# Altium PCB SystemV1.PcbDoc (part 2 of 3)
Units mm, origin at the board's own origin, x right, y up, seen from the top; angles counter-clockwise.
Board outline 488.95 x 74.14 mm, 4 copper layers (Top Layer, GND, VCC, Bottom Layer), stack 1.586 mm thick; 264 components, 188 nets, 862 pads, 658 vias.
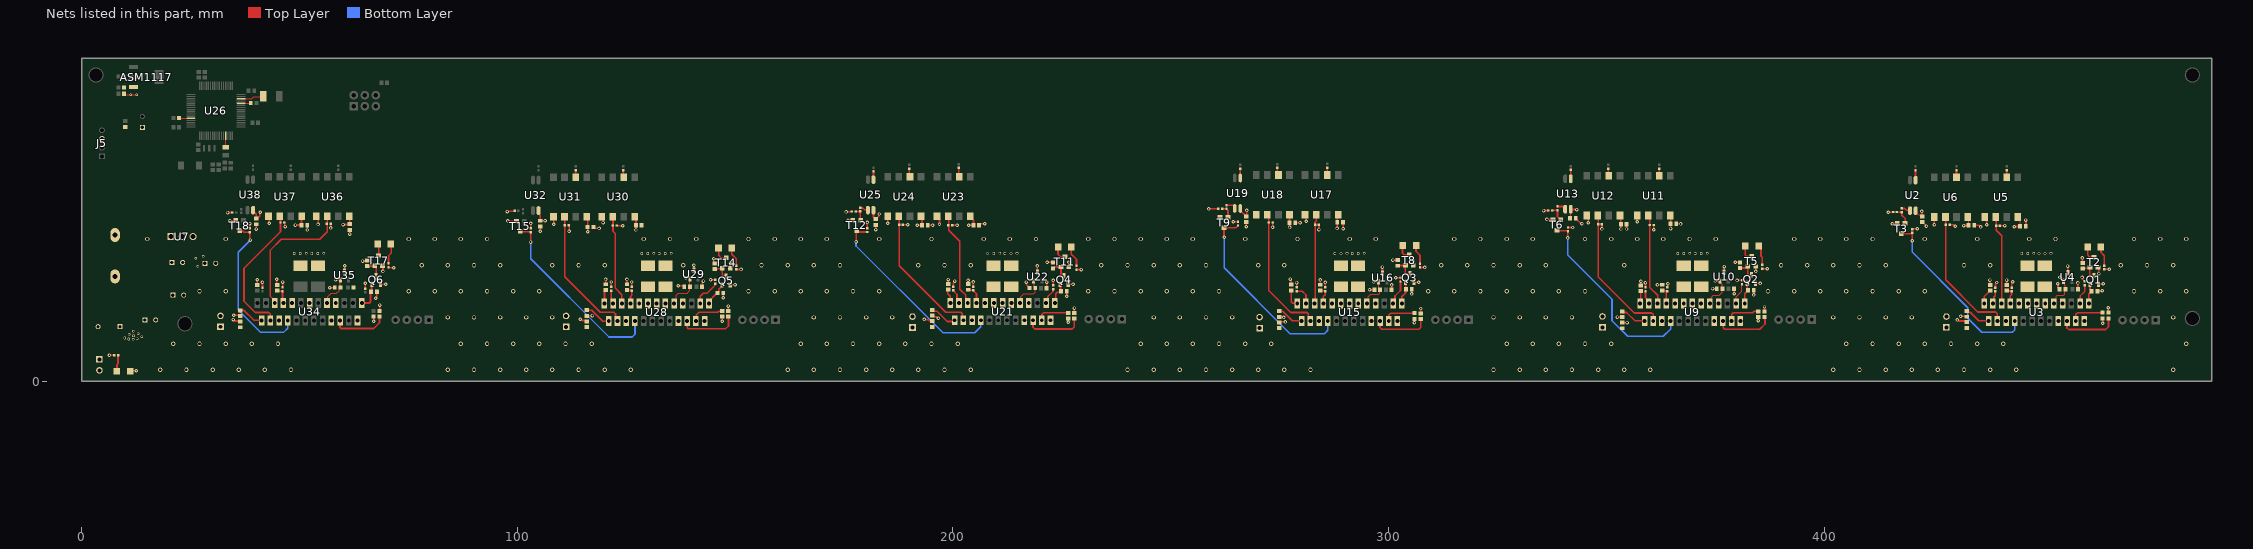
[diagram p4: the nets of this part, all layers, seen from the top]

## Via types
v1: diameter 1, hole 0.6, Top Layer to Bottom Layer, tented both sides, 342 vias
v2: diameter 0.8, hole 0.4, Top Layer to Bottom Layer, tented both sides, 207 vias
v3: diameter 0.6, hole 0.4, Top Layer to Bottom Layer, tented both sides, 109 vias

## Nets (pads, with @x,y where several pads share a name; then routed paths per layer and width w, separated by ;. In a path a pad name is that pad's centre, name@x,y a point inside that pad or via, vN(x,y) a via of type N, cw(c..) or ccw(c..) an arc to the next point about the centre after c; other vN are vias at no path point) (continued)
+5V: C3.2 C7.2 C9.2 C11.2 C16.1 C37.2 C41.2 C42.2 C43.2 C48.2 C52.2 C53.2 C54.2 C59.2 C63.2 C64.2 C65.2 C75.2 C79.2 C80.2 C81.2 C87.2 C91.2 C92.2 C93.2 R2.1 R6.1 R9.2 R10.2 R12.2 R13.1 R17.1 R19.1 R23.1 R27.2 R28.2 R29.2 R30.1 R34.1 R36.1 R38.1 R43.1 R47.2 R49.2 R50.2 R51.1 R55.1 R57.1 R59.1 R64.1 R68.2 R69.2 R70.2 R71.1 R75.1 R77.1 R79.1 R86.1 R90.2 R91.2 R92.2 R93.1 R97.1 R99.1 R101.1 R106.1 R110.2 R111.2 R112.2 R113.1 R117.1 R119.1 R121.1 U2.4 U3.9 U4.1 U5.8 U6.8 U7.3 U9.9 U10.1 U11.8 U12.8 U13.4 U15.9 U16.1 U17.8 U18.8 U19.4 U21.9 U22.1 U23.8 U24.8 U25.4 U28.9 U29.1 U30.8 U31.8 U32.4 U34.9 U35.1 U36.8 U37.8 U38.4 | length 163.4
  Top Layer w0.25: U34.9@56.345,17.97 56.476,18.101 56.476,19.342 57.302,20.168 58.522,20.168 59.157,20.803 59.157,21.244 C87.2@59.427,21.514 59.412,21.529 U35.1@59.412,23.292 ; U28.9@136.02,17.868 136.53,18.378 136.53,19.741 136.982,20.193 138.989,20.193 139.639,20.843 C75.2@139.639,21.717 139.624,21.732 U29.1@139.624,23.495 ; U21.9@215.404,17.995 215.57,18.161 215.57,19.38 216.23,20.041 218.491,20.041 218.912,20.462 C59.2@218.912,21.387 218.694,21.605 218.694,22.174 218.676,22.193 218.676,22.859 U22.1@218.506,23.028 ; U15.9@295.037,17.868 295.326,18.157 295.326,19.406 295.885,19.964 297.688,19.964 297.917,20.193 297.917,20.889 C48.2@298.033,21.006 298.033,21.056 297.703,21.386 U16.1@297.703,22.8 ; C43.2@341.666,37.389 341.808,37.531 U13.4@341.808,39.477 ; U9.9@373.748,17.843 374.027,18.122 374.027,19.215 374.574,19.761 375.92,19.761 376.631,20.472 C37.2@376.631,21.209 376.631,22.159 376.062,22.728 U10.1@376.062,23.003 ; U2.4@420.954,39.147 420.954,38.772 421.566,38.161 422.153,38.161 422.441,37.873 C3.2@422.478,37.836 ; U6.8@432.892,37.721 433.131,37.482 C11.2@433.131,35.789 ; U5.8@444.449,37.721 444.942,37.228 C9.2@444.942,35.535 ; U3.9@452.716,17.868 453.226,18.378 453.226,19.496 453.492,19.761 455.016,19.761 455.244,19.99 455.244,21.027 C7.2@455.325,21.107 455.27,21.163 455.27,21.895 455.18,21.985 455.18,22.676 U4.1@454.955,22.901
  Top Layer w0.381: R121.1@38.608,35.078 v2(38.608,36.184) ; U38.4@39.37,39.274 39.37,38.864 39.61,38.624 39.857,38.624 40.132,38.349 C93.2@40.132,37.328 ; R111.2@40.335,22.2 v2(40.335,23.305) ; C93.2@40.589,37.592 40.874,37.877 40.874,38.664 v2(40.996,38.786) ; R113.1@46.177,21.641 v2(46.177,22.746) ; R119.1@46.534,36.424 46.547,36.424 46.626,36.344 46.626,35.732 46.761,35.597 v2(46.761,35.484) ; v2(49.11,35.839) C92.2@50.216,35.839 ; C92.2@50.506,35.814 50.506,37.807 U37.8@50.546,37.848 ; v2(57.226,35.191) R117.1@57.226,36.17 ; v2(58.305,23.266) U35.1@59.411,23.266 ; v2(60.032,35.966) C91.2@61.138,35.966 ; U36.8@61.468,37.848 61.595,37.721 C91.2@61.595,36.043 ; R106.1@65.126,21.387 v2(65.126,22.492) ; R112.2@67.005,14.844 67.043,14.806 67.043,13.83 v2(67.081,13.792) ; v2(67.539,19.05) 67.539,19.163 67.782,19.407 67.782,20.264 67.781,20.264 R110.2@67.7,20.345 ; R101.1@103.124,35.104 v2(103.124,36.209) ; U32.4@104.902,39.172 104.902,38.482 105.283,38.101 C81.2@105.283,36.83 v2(106.388,36.83) ; v2(111.912,34.429) 111.912,35.535 ; U31.8@115.951,37.746 116.165,37.532 C80.2@116.165,35.382 v2(116.165,34.277) ; R91.2@120.294,22.265 v2(120.294,23.371) ; R97.1@123.114,35.712 v2(124.219,35.712) ; R93.1@126.314,21.667 v2(126.314,22.773) ; U30.8@127,37.746 127.254,37.492 C79.2@127.254,35.814 v2(127.254,34.709) ; v2(138.684,23.774) 139.464,23.774 139.624,23.615 U29.1@139.624,23.495 ; v2(144.386,23.267) R86.1@145.491,23.267 ; v2(147.066,13.739) R92.2@147.066,14.844 ; v2(147.284,19.138) R90.2@147.284,20.244 ; R79.1@180.356,35.111 180.361,35.115 180.361,36.444 v2(180.365,36.449) ; U25.4@181.762,39.274 181.762,37.659 182.22,37.201 C65.2@182.27,37.201 ; C65.2@182.575,37.338 182.575,37.455 183.003,37.883 183.003,38.299 v2(183.083,38.379) ; R77.1@188.545,35.916 v2(189.651,35.916) ; v2(191.818,35.789) C64.2@192.923,35.789 192.923,37.609 U24.8@192.684,37.848 ; R69.2@198.933,22.225 v2(198.933,23.343) ; R75.1@199.848,35.789 v2(200.954,35.789) ; v2(203.629,35.789) C63.2@204.734,35.789 204.734,36.973 203.987,37.72 U23.8@203.987,37.848 ; R71.1@204.699,21.693 v2(204.699,22.798) ; R64.1@223.012,22.023 v2(223.012,23.128) ; v2(226.126,19.519) R68.2@226.126,20.625 ; v2(226.492,13.513) R70.2@226.492,14.3 ; v2(264.35,36.602) R59.1@265.455,36.602 ; U19.4@265.963,39.655 265.963,39.183 267.31,37.836 C54.2@267.36,37.836 ; C54.2@267.437,38.1 v2(267.437,39.205) ; v2(273.381,35.318) R57.1@273.381,36.424 ; U18.8@277.266,38.229 277.277,38.218 C53.2@277.277,36.398 v2(277.277,35.293) ; v2(277.444,23.444) 277.444,23.331 277.673,23.102 R49.2@277.673,22.164 ; v2(284.024,34.81) R55.1@284.024,35.916 ; R51.1@285.471,21.566 v2(285.471,22.671) ; v2(288.188,35.064) C52.2@288.188,36.17 ; C52.2@288.224,36.449 288.224,38.01 U17.8@288.442,38.229 ; v2(296.598,22.8) U16.1@297.703,22.8 ; v2(301.637,23.75) R43.1@302.743,23.75 ; v2(305.323,20.027) R47.2@305.323,21.133 ; v2(305.943,13.449) R50.2@305.943,14.554 ; R38.1@341.173,35.282 v2(342.278,35.282) ; U13.4@342.087,39.395 v2(343.193,39.395) ; v2(348.972,34.963) R36.1@348.972,36.068 ; U12.8@353.111,38.051 353.324,37.837 C42.2@353.324,36.043 v2(353.324,34.937) ; R28.2@357.886,21.96 357.899,21.972 357.899,22.924 v2(357.911,22.936) ; v2(360.833,34.759) R34.1@360.833,35.865 ; R30.1@363.982,21.54 364.046,21.604 364.046,22.314 v2(364.109,22.377) ; U11.8@364.668,38.051 364.729,37.99 C41.2@364.729,36.144 v2(364.729,35.039) ; v2(374.957,23.003) U10.1@376.062,23.003 ; v2(379.996,23.14) R23.1@381.102,23.14 ; v2(383.809,19.799) R27.2@383.809,20.904 ; v2(384.861,13.868) 384.874,13.881 384.874,14.73 R29.2@384.886,14.742 ; R6.1@420.192,34.926 420.23,34.964 421.298,34.964 v2(421.335,35.001) ; C3.2@422.441,37.873 v2@422.441,38.941 ; R19.1@428.791,35.953 428.828,35.916 429.629,35.916 429.959,35.585 v2(430.073,35.585) ; v2@432.026,35.751 C11.2@433.094,35.751 ; R10.2@438.062,22.124 v2@438.062,23.192 ; R17.1@440.348,35.699 v2@441.415,35.699 ; R13.1@443.015,21.526 443.052,21.564 443.052,22.518 443.255,22.721 v2(443.255,22.835) ; v2@443.623,35.497 C9.2@444.691,35.497 ; v2(454.025,23.851) 454.105,23.77 454.359,23.77 U4.1@454.673,23.456 ; v2(459.181,23.825) 459.261,23.745 459.261,23.454 459.728,22.988 R2.1@459.728,22.975 ; R9.2@462.714,20.713 v2@463.781,20.713 ; v2@463.892,13.332 R12.2@463.892,14.4
  other v2: 463.93,13.295 463.819,20.751 438.024,23.23 443.586,35.459 431.988,35.713 441.453,35.737 422.403,38.979
  other v3: 26.721,26.391 26.238,28.219 27.94,28.651
+5V_uC: ASM1117.Vin C17.2 C18.2 C20.1 C21.2 J5.3 | length 3
  Top Layer w0.25: C18.2@9.794,66.015 10.073,65.735 v3(12.7,65.735)
  other v3: 11.307,65.777
+24V: C5.2 C6.1 C12.1 C13.1 C14.1 C15.1 C36.2 C38.1 C47.2 C49.1 C58.2 C60.1 C66.2 C68.2 C70.2 C72.2 C73.2 C74.2 C76.1 C85.2 C86.2 C88.1 F1.1 P1.2 R4.1 R5.2 R21.1 R24.1 R25.2 R44.1 R45.2 R65.1 R66.2 R87.1 R88.2 R107.1 R108.2 U3.6 U3.20 U7.1 U9.6 U9.20 U15.6 U15.20 U21.6 U21.20 U28.6 U28.20 U34.6 U34.20 | length 94.2
  Top Layer w0.381: v2(6.412,5.944) R21.1@7.517,5.944 ; U34.6@59.345,13.97 59.345,12.339 59.568,12.116 67.081,12.116 68.402,13.437 C85.2@68.402,14.844 ; v2(64.503,27.576) R108.2@65.608,27.576 ; R107.1@70.561,26.06 v2(71.667,26.06) ; U28.6@139.02,13.868 139.02,12.237 139.243,12.014 147.828,12.014 148.488,12.675 148.488,14.793 C74.2@148.438,14.844 ; R88.2@145.085,27 v2(145.085,28.106) ; R87.1@150.266,25.653 v2(151.372,25.653) ; U21.6@218.404,13.995 218.404,12.406 218.821,11.989 227.432,11.989 227.889,12.446 C72.2@227.889,14.387 ; v2(221.627,27.28) R66.2@222.733,27.28 ; R65.1@228.371,25.628 v2(229.477,25.628) ; U15.6@298.037,13.868 298.037,12.326 298.399,11.963 306.99,11.963 307.391,12.364 C47.2@307.391,14.285 ; v2(301.002,27.803) R45.2@302.108,27.803 ; R44.1@307.213,26.11 v2(308.318,26.11) ; U9.6@376.748,13.843 376.834,13.756 376.834,12.268 377.19,11.913 385.166,11.913 386.385,13.132 386.385,14.615 C68.2@386.283,14.717 ; v2(379.564,27.295) R25.2@380.67,27.295 ; R24.1@385.801,25.831 v2(386.906,25.831) ; U3.6@455.716,13.868 455.716,12.228 456.082,11.862 464.591,11.862 465.252,12.522 465.252,14.412 C66.2@465.226,14.438 ; R5.2@459.271,27.18 v2@459.271,28.248 ; R4.1@464.324,25.691 v2@465.392,25.691
  other v2: 465.43,25.728 459.233,28.285
  other v3: 11.887,9.601 10.846,9.677 12.751,9.779 9.881,9.931 13.843,10.236 11.938,10.414 10.922,10.795 12.979,10.897 11.918,11.468
ALRET_1: Q1.1 R9.1 U3.1 | length 4.8
  Top Layer w0.381: U3.1@460.716,17.868 460.716,19.966 461.376,20.626 R9.1@461.376,20.676 461.376,20.726 461,21.102 Q1.1@461,22.266
ALRET_2: Q2.1 R27.1 U9.1 | length 5
  Top Layer w0.381: U9.1@381.748,17.843 381.748,20.093 382.509,20.854 R27.1@382.509,20.904 382.321,21.092 Q2.1@382.321,22.454
ALRET_3: Q3.1 R47.1 U15.1 | length 5.3
  Top Layer w0.381: U15.1@303.037,17.868 303.037,19.37 303.886,20.218 303.886,20.995 R47.1@304.023,21.133 303.975,21.181 303.975,22.65 Q3.1@303.926,22.698
ALRET_4: Q4.1 R68.1 U21.1 | length 5.3
  Top Layer w0.381: U21.1@223.404,17.995 223.596,18.187 223.596,20.041 223.977,20.422 224.623,20.422 R68.1@224.826,20.625 224.701,20.749 224.701,22.116 Q4.1@224.577,22.241
ALRET_5: Q5.1 R90.1 U28.1 | length 5.6
  Top Layer w0.381: U28.1@144.02,17.868 144.02,18.376 145.578,19.934 145.725,19.934 145.984,20.194 R90.1@145.984,20.244 146.244,20.503 146.244,21.078 147.005,21.839 Q5.1@147.005,22.114
ALRET_6: Q6.1 R110.1 U34.1 | length 6.2
  Top Layer w0.381: U34.1@64.345,17.97 66.096,17.97 66.319,18.193 66.319,20.411 R110.1@66.482,20.574 ; R110.1@66.573,20.574 66.573,22.123 Q6.1@66.692,22.241
CLK_1: R17.2 U3.21 U5.6 | length 20.4
  Top Layer w0.381: U5.6@439.369,37.721 439.444,37.645 R17.2@439.444,35.662 439.444,34.647 440.716,33.375 U3.21@440.716,17.868
CLK_2: R34.2 U9.21 U11.6 | length 21.1
  Top Layer w0.381: U11.6@359.588,38.051 359.955,37.684 R34.2@359.955,35.865 ; R34.2@359.968,35.865 359.968,21.515 361.748,19.735 U9.21@361.748,17.843
CLK_3: R55.2 U15.21 U17.6 | length 20.9
  Top Layer w0.381: U15.21@283.037,17.868 283.158,17.99 R55.2@283.158,35.916 283.108,35.965 283.108,36.43 283.362,36.684 U17.6@283.362,38.229 U17.6@283.125,37.991
CLK_4: R75.2 U21.21 U23.6 | length 21.7
  Top Layer w0.381: U23.6@198.907,37.848 199.085,37.67 199.085,35.789 199.085,34.62 201.6,32.106 201.6,21.133 202.96,19.773 202.96,18.44 U21.21@203.404,17.995
CLK_5: R97.2 U28.21 U30.6 | length 20.7
  Top Layer w0.381: U30.6@121.92,37.746 121.97,37.696 R97.2@121.97,35.738 R97.2@121.97,35.738 121.971,34.442 122.542,33.871 122.542,21.323 124.02,19.846 U28.21@124.02,17.868
CLK_6: R117.2 U34.21 U36.6 | length 30.9
  Top Layer w0.381: U34.21@44.345,17.97 44.345,18.478 43.282,19.541 43.282,29.997 45.872,32.588 54.686,32.588 56.388,34.29 U36.6@56.388,37.848
DIR_1: R19.2 U3.22 U6.6 | length 31.2
  Top Layer w0.381: U6.6@427.812,37.721 427.887,37.645 R19.2@427.887,35.916 427.887,23.267 435.254,15.9 439.344,15.9 439.716,15.528 U3.22@439.716,13.868
DIR_2: R36.2 U9.22 U12.6 | length 31.9
  Top Layer w0.381: U12.6@348.031,38.051 348.106,37.976 R36.2@348.106,36.068 348.106,23.928 356.362,15.672 360.426,15.672 360.748,15.35 U9.22@360.748,13.843
DIR_3: R57.2 U15.22 U18.6 | length 30.6
  Top Layer w0.381: U18.6@272.186,38.229 272.516,37.899 R57.2@272.516,36.424 272.516,20.804 277.546,15.773 281.305,15.773 281.593,15.486 281.593,14.313 U15.22@282.037,13.868
DIR_4: R77.2 U21.22 U24.6 | length 32
  Top Layer w0.381: U24.6@187.604,37.848 187.68,37.772 R77.2@187.68,35.916 187.68,26.519 198.349,15.85 201.828,15.85 202.184,15.494 202.184,14.216 U21.22@202.404,13.995
DIR_5: R99.2 U28.22 U31.6 | length 30.7
  Top Layer w0.381: U31.6@110.871,37.746 110.946,37.671 R99.2@110.946,35.814 110.946,23.953 119.075,15.824 122.174,15.824 122.575,15.423 122.575,14.313 U28.22@123.02,13.868
DIR_6: R119.2 U34.22 U37.6 | length 31.8
  Top Layer w0.381: U34.22@43.345,13.97 43.358,13.983 43.358,15.367 42.951,15.773 39.853,15.773 37.287,18.339 37.287,25.908 45.668,34.289 R119.2@45.668,36.424 45.668,37.645 U37.6@45.466,37.848
ENABLE_1: R6.2 T3.C U3.18 | length 42.2
  Top Layer w0.381: T3.C@417.819,33.993 T3.C@417.652,33.827 419.958,33.827 420.1,33.968 R6.2@420.113,33.968 ; R6.2@420.192,34.06 420.192,34.048 R6.2@420.113,33.968 ; v2(420.218,32.233) 420.205,32.245 420.205,33.968 R6.2@420.113,33.968
  Bottom Layer w0.381: v2(420.218,32.233) 420.218,29.642 432.968,16.891 432.968,14.427 436.169,11.227 443.179,11.227 443.716,11.764 U3.18@443.716,13.868
ENABLE_2: R38.2 T6.C U9.18 | length 44.9
  Top Layer w0.381: T6.C@338.633,34.665 338.789,34.508 341.093,34.508 341.173,34.429 R38.2@341.173,34.416 341.135,34.378 341.135,32.931 v2(341.097,32.893)
  Bottom Layer w0.381: v2(341.097,32.893) 341.097,28.981 351.295,18.783 351.295,13.907 354.914,10.287 363.068,10.287 364.748,11.967 U9.18@364.748,13.843
ENABLE_3: R59.2 T9.C U15.18 | length 45.2
  Top Layer w0.381: v2(262.255,33.02) 262.242,33.033 262.242,35.211 T9.C@262.23,35.224 264.942,35.224 265.363,35.644 265.376,35.644 265.455,35.724 R59.2@265.455,35.737
  Bottom Layer w0.381: v2(262.255,33.02) 262.255,26.035 277.368,10.922 285.293,10.922 286.037,11.666 U15.18@286.037,13.868
ENABLE_4: R79.2 T12.C U21.18 | length 45.1
  Top Layer w0.381: v2(177.775,32.004) 177.853,32.083 177.853,34.485 T12.C@177.932,34.564 177.982,34.564 178.301,34.245 R79.2@180.356,34.245
  Bottom Layer w0.381: v2(177.775,32.004) 177.775,31.039 197.714,11.1 205.003,11.1 206.404,12.501 U21.18@206.404,13.995
ENABLE_5: R101.2 T15.C U28.18 | length 43.3
  Top Layer w0.381: T15.C@100.711,34.36 100.772,34.299 103.063,34.299 R101.2@103.124,34.238 103.099,34.213 103.099,31.953 v2(103.073,31.928)
  Bottom Layer w0.381: v2(103.073,31.928) 103.073,28.138 121.052,10.16 126.416,10.16 127.02,10.764 U28.18@127.02,13.868
ENABLE_6: R121.2 T18.C U34.18 | length 37.2
  Top Layer w0.381: T18.C@36.311,34.532 36.349,34.569 36.982,34.569 37.339,34.213 R121.2@38.608,34.213 38.608,32.6 38.71,32.498 v2(38.71,32.385)
  Bottom Layer w0.381: v2(38.71,32.385) 38.71,32.334 35.941,29.566 35.941,16.332 40.996,11.278 46.457,11.278 47.345,12.166 U34.18@47.345,13.97
GND: C3.1 C4.1 C5.1 C6.2 C7.1 C8.1 C9.1 C10.1 C11.1 C12.2 C13.2 C14.2 C15.2 C16.2 C35.1 C36.1 C37.1 C38.2 C39.1 C40.1 C41.1 C42.1 C43.1 C46.1 C47.1 C48.1 C49.2 C50.1 C51.1 C52.1 C53.1 C54.1 C57.1 C58.1 C59.1 C60.2 C61.1 C62.1 C63.1 C64.1 C65.1 C66.1 C68.1 C70.1 C71.1 C72.1 C73.1 C74.1 C75.1 C76.2 C77.1 C78.1 C79.1 C80.1 C81.1 C84.1 C85.1 C86.1 C87.1 C88.2 C89.1 C90.1 C91.1 C92.1 C93.1 F1.2 LED2.2 P1.1 Q1.2 Q2.2 Q3.2 Q4.2 Q5.2 Q6.2 R11.2 R14.2 R15.1 R16.1 R31.2 R32.1 R33.1 R41.2 R52.2 R53.1 R54.1 R62.2 R72.2 R73.1 R74.1 R82.2 R94.2 R95.1 R96.1 R104.2 R114.2 R115.1 R116.1 R124.2 T2.E T3.E T5.E T6.E T8.E T9.E T11.E T12.E T14.E T15.E T17.E T18.E U3.2 U3.7 U3.8 U3.13 U3.17 U4.3 U5.5 U6.5 U7.2 U9.2 U9.7 U9.8 U9.13 U9.17 U10.3 U11.5 U12.5 U15.2 U15.7 U15.8 U15.13 U15.17 U16.3 U17.5 U18.5 U21.2 U21.7 U21.8 U21.13 U21.17 U22.3 U23.5 U24.5 U28.2 U28.7 U28.8 U28.13 U28.17 U29.3 U30.5 U31.5 U34.2 U34.7 U34.8 U34.13 U34.17 U35.3 U36.5 U37.5 | length 117.7
  Top Layer w0.381: LED2.2@11.43,2.388 v2(12.535,2.388) ; v2(33.514,38.71) R124.2@34.619,38.71 ; v2(34.074,36.855) T18.E@35.179,36.855 ; v2(34.798,14.148) 34.911,14.148 35.229,13.83 36.089,13.83 36.119,13.86 C86.1@36.119,13.868 ; v2(34.963,15.138) C84.1@36.068,15.138 ; v2(40.132,34.922) C93.1@40.132,36.028 ; R114.2@41.529,21.59 v2(41.529,22.695) ; v2(43.078,36.258) U37.5@43.078,37.363 ; C89.1@44.806,22.301 v2(44.806,23.407) ; v2(51.806,34.709) C92.1@51.806,35.814 ; U36.5@54.026,37.592 54.305,37.313 v2(54.305,35.992) ; v2(56.959,21.438) C87.1@58.064,21.438 ; U35.3@60.427,25.4 v2(60.427,26.505) ; v2(61.595,33.787) C91.1@61.595,34.893 ; v2(68.428,17.475) 68.428,16.404 68.651,16.18 C85.1@68.656,16.18 ; Q6.2@68.707,22.276 v2(69.812,22.276) ; v2(69.19,25.209) T17.E@69.19,26.314 ; v2(97.714,38.938) 97.79,39.014 R104.2@99.111,39.014 ; v2(97.815,36.779) 97.841,36.754 T15.E@99.39,36.754 ; v2(105.283,34.425) C81.1@105.283,35.53 ; v2(108.382,36.029) U31.5@108.382,37.135 ; v2(114.452,14.249) 114.566,14.249 114.88,13.936 115.642,13.936 115.697,13.88 C73.1@115.697,13.843 ; C71.1@115.926,15.011 115.951,15.037 117.246,15.037 v2(117.272,15.062) ; C80.1@117.678,35.077 v2(118.784,35.077) ; v2(119.71,36.41) U30.5@119.71,37.516 ; R94.2@121.59,21.667 v2(121.59,22.773) ; C77.1@125.197,22.265 v2(125.197,23.371) ; v2(136.982,21.92) 138.079,21.92 138.1,21.941 C75.1@138.1,21.971 ; U29.3@140.574,25.495 v2(140.574,26.6) ; C78.1@142.458,21.692 142.458,22.584 142.748,22.874 v2(142.748,22.987) ; C74.1@148.438,16.144 v2(148.438,17.249) ; T14.E@148.88,25.953 v2(148.88,27.058) ; Q5.2@148.905,22.114 v2(150.01,22.114) ; v2(175.475,38.862) R82.2@176.581,38.862 ; v2(175.927,36.964) T12.E@177.032,36.964 ; v2(182.27,34.795) C65.1@182.27,35.901 ; v2(185.039,36.233) U24.5@185.039,37.338 ; v2(193.446,14.173) 193.527,14.093 194.402,14.093 194.601,13.894 C58.1@194.92,13.894 ; C64.1@194.223,35.789 v2(195.329,35.789) ; C57.1@195.275,14.783 196.254,14.783 196.559,14.478 v2(196.672,14.478) ; U23.5@196.52,37.262 196.812,37.262 196.926,37.148 v2(196.926,36.043) ; R72.2@200.05,21.693 200.05,22.493 200.431,22.874 v2(200.431,22.987) ; C61.1@203.479,22.073 v2(203.479,23.178) ; C63.1@206.197,36.17 v2(207.303,36.17) ; v2(216.865,22.758) 216.945,22.678 216.945,22.104 217.399,21.65 C59.1@217.399,21.59 ; U22.3@219.38,25.349 v2(219.38,26.455) ; C62.1@221.564,21.59 v2(221.564,22.695) ; Q4.2@226.477,22.241 v2(227.582,22.241) ; T11.E@226.604,26.207 v2(226.604,27.312) ; C72.1@227.889,15.687 v2(227.889,16.792) ; v2(258.75,39.548) 258.775,39.573 260.882,39.573 R62.2@260.908,39.599 ; v2(267.36,35.43) C54.1@267.36,36.536 ; C46.1@274.93,14.778 275.004,14.704 275.872,14.704 v2(275.946,14.63) ; C70.1@275.184,13.614 v2(276.289,13.614) ; C53.1@278.577,36.398 v2(279.682,36.398) ; R52.2@278.892,21.54 v2(278.892,22.646) ; v2(281.076,36.69) U17.5@281.076,37.795 ; C50.1@284.328,22.138 v2(284.328,23.244) ; v2(289.56,34.988) C52.1@289.56,36.093 ; v2(295.628,21.006) C48.1@296.733,21.006 ; U16.3@298.602,25.095 v2(298.602,26.201) ; C51.1@300.7,21.006 v2(300.7,22.111) ; T8.E@305.66,26.619 v2(305.66,27.725) ; Q3.2@305.826,22.698 v2(306.932,22.698) ; C47.1@307.391,15.585 v2(307.391,16.691) ; v2(335.571,39.167) R41.2@336.676,39.167 ; v2(336.334,37.135) T6.E@337.439,37.135 ; C43.1@342.966,37.389 342.966,37.339 344.106,36.199 344.293,36.199 v2(344.373,36.119) ; v2(345.821,36.36) U12.5@345.821,37.465 ; v2(352.539,14.727) C35.1@353.644,14.727 ; C36.1@353.644,13.452 v2(354.75,13.452) ; v2(354.624,34.937) C42.1@354.624,36.043 ; v2(357.048,36.588) U11.5@357.048,37.694 ; R31.2@358.953,21.515 v2(358.953,22.62) ; v2(361.708,22.138) C39.1@362.814,22.138 ; C41.1@366.029,36.144 366.054,36.119 366.979,36.119 v2(367.005,36.093) ; v2(374.371,21.26) 374.396,21.234 375.306,21.234 C37.1@375.331,21.209 ; U10.3@377.063,25.222 v2(377.063,26.328) ; v2(379.313,20.104) C40.1@379.313,21.209 ; Q2.2@384.221,22.454 v2(385.326,22.454) ; v2(384.251,25.209) T5.E@384.251,26.314 ; C68.1@386.283,16.017 v2(386.283,17.122) ; v2@414.717,38.799 R11.2@415.785,38.799 ; v2@415.647,36.189 T3.E@416.715,36.189 ; C3.1@422.389,36.41 422.653,36.41 423.443,35.62 v2(423.443,35.56) ; v2@425.259,35.953 U6.5@425.259,37.021 ; v2(430.53,14.072) 430.643,14.072 430.897,13.818 C5.1@432.206,13.818 ; v2(431.279,14.91) C4.1@432.384,14.91 ; C11.1@434.469,35.826 435.453,35.826 435.871,35.408 v2(435.889,35.408) ; U5.5@437.121,37.097 437.21,37.097 437.286,37.021 v2(437.286,35.916) ; R14.2@439.179,21.501 439.242,21.501 439.296,21.555 439.296,22.242 439.598,22.543 v2(439.598,22.657) ; C8.1@441.872,22.124 v2@441.872,23.192 ; C9.1@446.291,35.877 v2@446.291,36.945 ; v2(453.568,22.377) 453.648,22.297 453.648,21.422 453.683,21.387 C7.1@453.683,21.323 ; U4.3@455.892,25.336 v2@455.892,26.404 ; C10.1@458.255,21.45 v2@458.255,22.518 ; Q1.2@462.937,22.304 v2@464.005,22.304 ; v2@463.003,24.752 T2.E@463.003,25.82 ; C66.1@465.189,15.775 v2@465.189,16.843
  other v1: 18.084,2.64 24.084,2.64 30.084,2.64 36.084,2.64 42.084,2.64 48.084,2.64 84.084,2.64 90.084,2.64 96.084,2.64 102.084,2.64 108.084,2.64 114.084,2.64 120.084,2.64 126.084,2.64 162.084,2.64 168.084,2.64 174.084,2.64 180.084,2.64 186.084,2.64 192.084,2.64 198.084,2.64 204.084,2.64 240.084,2.64 246.084,2.64 252.084,2.64 258.084,2.64 264.084,2.64 270.084,2.64 276.084,2.64 282.084,2.64 324.084,2.64 330.084,2.64 336.084,2.64 342.084,2.64 348.084,2.64 354.084,2.64 360.084,2.64 402.084,2.64 408.084,2.64 414.084,2.64 420.084,2.64 426.084,2.64 432.084,2.64 438.084,2.64 444.084,2.64 480.084,2.64 21.084,8.64 27.084,8.64 33.084,8.64 39.084,8.64 45.084,8.64 87.084,8.64 93.084,8.64 99.084,8.64 105.084,8.64 111.084,8.64 117.084,8.64 165.084,8.64 171.084,8.64 177.084,8.64 183.084,8.64 189.084,8.64 195.084,8.64 201.084,8.64 243.084,8.64 249.084,8.64 255.084,8.64 261.084,8.64 267.084,8.64 273.084,8.64 327.084,8.64 333.084,8.64 339.084,8.64 345.084,8.64 351.084,8.64 405.084,8.64 411.084,8.64 417.084,8.64 423.084,8.64 429.084,8.64 435.084,8.64 441.084,8.64 483.084,8.64 84.084,14.64 90.084,14.64 96.084,14.64 102.084,14.64 108.084,14.64 168.084,14.64 174.084,14.64 180.084,14.64 186.084,14.64 246.084,14.64 252.084,14.64 258.084,14.64 264.084,14.64 324.084,14.64 330.084,14.64 336.084,14.64 342.084,14.64 402.084,14.64 408.084,14.64 414.084,14.64 420.084,14.64 480.084,14.64 27.084,20.64 33.084,20.64 75.084,20.64 81.084,20.64 87.084,20.64 93.084,20.64 99.084,20.64 105.084,20.64 153.084,20.64 159.084,20.64 165.084,20.64 171.084,20.64 177.084,20.64 183.084,20.64 231.084,20.64 237.084,20.64 243.084,20.64 249.084,20.64 255.084,20.64 261.084,20.64 309.084,20.64 315.084,20.64 321.084,20.64 327.084,20.64 333.084,20.64 339.084,20.64 345.084,20.64 387.084,20.64 393.084,20.64 399.084,20.64 405.084,20.64 411.084,20.64 417.084,20.64 423.084,20.64 471.084,20.64 477.084,20.64 483.084,20.64 78.084,26.64 84.084,26.64 90.084,26.64 96.084,26.64 108.084,26.64 114.084,26.64 120.084,26.64 138.084,26.64 156.084,26.64 162.084,26.64 168.084,26.64 174.084,26.64 192.084,26.64 198.084,26.64 204.084,26.64 234.084,26.64 240.084,26.64 246.084,26.64 252.084,26.64 258.084,26.64 270.084,26.64 276.084,26.64 312.084,26.64 318.084,26.64 324.084,26.64 330.084,26.64 336.084,26.64 354.084,26.64 390.084,26.64 396.084,26.64 402.084,26.64 408.084,26.64 414.084,26.64 432.084,26.64 438.084,26.64 468.084,26.64 474.084,26.64 480.084,26.64 15.084,32.64 33.084,32.64 75.084,32.64 81.084,32.64 87.084,32.64 93.084,32.64 129.084,32.64 135.084,32.64 141.084,32.64 153.084,32.64 159.084,32.64 165.084,32.64 171.084,32.64 183.084,32.64 195.084,32.64 207.084,32.64 213.084,32.64 219.084,32.64 231.084,32.64 237.084,32.64 243.084,32.64 249.084,32.64 255.084,32.64 267.084,32.64 279.084,32.64 291.084,32.64 297.084,32.64 315.084,32.64 321.084,32.64 327.084,32.64 333.084,32.64 345.084,32.64 351.084,32.64 357.084,32.64 363.084,32.64 369.084,32.64 375.084,32.64 393.084,32.64 399.084,32.64 405.084,32.64 411.084,32.64 423.084,32.64 435.084,32.64 447.084,32.64 453.084,32.64 471.084,32.64 477.084,32.64 483.084,32.64
  other v2: 465.151,16.881 464.043,22.342 458.217,22.555 441.834,23.23 463.041,24.714 455.855,26.441 425.297,35.916 415.609,36.151 446.254,36.982 414.679,38.761
  other v3: 48.819,29.312 50.216,29.312 52.807,29.312 54.204,29.312 128.575,29.312 129.972,29.312 132.563,29.312 133.96,29.312 207.95,29.312 209.347,29.312 211.938,29.312 213.335,29.312 287.68,29.312 289.077,29.312 291.668,29.312 293.065,29.312 366.37,29.312 367.767,29.312 370.357,29.312 371.754,29.312 445.287,29.312 446.684,29.312 449.275,29.312 450.672,29.312 51.587,29.337 55.575,29.337 131.343,29.337 135.331,29.337 210.718,29.337 214.706,29.337 290.449,29.337 294.437,29.337 369.138,29.337 373.126,29.337 448.056,29.337 452.044,29.337
NetC4_2: C4.2 U3.24 | length 6
  Top Layer w0.381: C4.2@432.689,16.104 432.949,15.844 433.507,15.844 435.483,13.868 U3.24@437.718,13.868
NetC8_2: C8.2 R13.2 U3.19 | length 4.1
  Top Layer w0.381: C8.2@441.909,20.787 441.991,20.705 442.973,20.705 443.052,20.625 R13.2@443.052,20.623 442.973,20.543 442.973,19.834 442.716,19.578 U3.19@442.716,17.868
NetC31_1: C31.1 U26.30 | length 5.3
  Top Layer w0.25: U26.30@36.611,64.828 39.072,64.828 39.522,65.278 41.599,65.278 C31.1@41.7,65.38
NetC35_2: C35.2 U9.24 | length 6
  Top Layer w0.381: C35.2@353.644,16.027 353.904,15.768 354.615,15.768 356.54,13.843 U9.24@358.75,13.843
NetC39_2: C39.2 R30.2 U9.19 | length 4.2
  Top Layer w0.381: C39.2@362.814,20.838 362.896,20.756 363.903,20.756 363.982,20.677 R30.2@363.982,20.675 363.982,20.662 363.748,20.428 U9.19@363.748,17.843
NetC46_2: C46.2 U15.24 | length 6
  Top Layer w0.381: C46.2@274.93,16.078 274.955,16.053 275.717,16.053 277.901,13.868 U15.24@280.039,13.868
NetC50_2: C50.2 R51.2 U15.19 | length 4.2
  Top Layer w0.381: C50.2@284.328,20.838 284.397,20.769 285.401,20.769 R51.2@285.471,20.7 285.445,20.675 285.445,19.863 285.037,19.455 U15.19@285.037,17.868
NetC57_2: C57.2 U21.24 | length 6.3
  Top Layer w0.381: C57.2@195.301,16.358 195.56,16.098 196.297,16.098 198.679,13.716 200.127,13.716 U21.24@200.406,13.995
NetC61_2: C61.2 R71.2 U21.19 | length 4.3
  Top Layer w0.381: C61.2@203.556,20.991 203.638,20.909 204.619,20.909 204.699,20.829 R71.2@204.699,20.827 204.699,20.814 205.404,20.109 U21.19@205.404,17.995
NetC71_2: C71.2 U28.24 | length 6.2
  Top Layer w0.381: C71.2@115.926,16.311 117.145,16.311 119.664,13.792 120.945,13.792 U28.24@121.022,13.868
NetC77_2: C77.2 R93.2 U28.19 | length 4.2
  Top Layer w0.381: C77.2@125.197,20.965 125.279,20.883 126.235,20.883 126.314,20.804 R93.2@126.314,20.802 126.314,19.71 126.02,19.416 U28.19@126.02,17.868
NetC84_2: C84.2 U34.24 | length 5.9
  Top Layer w0.381: C84.2@36.398,16.271 37.272,16.271 39.573,13.97 U34.24@41.347,13.97
NetC89_2: C89.2 R113.2 U34.19 | length 4
  Top Layer w0.381: C89.2@44.958,20.813 45.111,20.66 R113.2@46.126,20.66 46.126,18.189 U34.19@46.345,17.97
NetL1_2: L1.2 U26.13 | length 2.2
  Top Layer w0.25: L1.2@33.111,54.137 U26.13@33.111,56.328
NetLED1_1: LED1.1 R4.2 | length 4.6
  Top Layer w0.381: LED1.1@463.499,30.81 463.499,29.591 464.287,28.804 R4.2@464.287,26.519
NetLED1_2: LED1.2 T2.C | length 3.5
  Top Layer w0.381: LED1.2@460.451,30.81 460.451,28.956 460.921,28.486 T2.C@461.913,28.486
NetLED2_1: LED2.1 R21.2 | length 3.8
  Top Layer w0.381: LED2.1@8.103,2.286 8.128,2.311 8.128,3.759 8.383,4.014 R21.2@8.383,5.944
NetLED3_1: LED3.1 R24.2 | length 4.7
  Top Layer w0.381: LED3.1@384.937,31.013 385.497,30.454 385.497,28.748 385.801,28.444 R24.2@385.801,26.696
NetLED3_2: LED3.2 T5.C | length 3.6
  Top Layer w0.381: LED3.2@381.889,31.013 381.889,28.981 382.156,28.714 T5.C@383.351,28.714
NetLED4_1: LED4.1 R44.2 | length 4.5
  Top Layer w0.381: LED4.1@306.299,31.14 306.299,29.845 307.213,28.931 R44.2@307.213,26.976
NetLED4_2: LED4.2 T8.C | length 3.5
  Top Layer w0.381: LED4.2@303.251,31.14 303.2,31.09 303.2,29.388 303.568,29.019 T8.C@304.76,29.019
NetLED5_1: LED5.1 R65.2 | length 4.8
  Top Layer w0.381: LED5.1@227.178,30.836 227.178,29.159 228.371,27.965 R65.2@228.371,26.493
NetLED5_2: LED5.2 T11.C | length 3.5
  Top Layer w0.381: LED5.2@224.13,30.836 224.13,29.134 224.657,28.607 T11.C@225.704,28.607
NetLED6_1: LED6.1 R87.2 | length 4.5
  Top Layer w0.381: LED6.1@149.25,30.607 149.25,29.159 150.266,28.143 R87.2@150.266,26.519
NetLED6_2: LED6.2 T14.C | length 3.7
  Top Layer w0.381: LED6.2@146.202,30.607 146.228,30.582 146.228,28.905 146.78,28.353 T14.C@147.98,28.353
NetLED7_1: LED7.1 R107.2 | length 4.8
  Top Layer w0.381: R107.2@70.46,27.027 70.46,28.753 71.12,29.413 71.12,31.394 LED7.1@71.018,31.496
NetLED7_2: LED7.2 T17.C | length 2.7
  Top Layer w0.381: LED7.2@67.97,31.496 68.188,31.278 T17.C@68.188,28.868
NetQ1_3: Q1.3 R5.1 T2.B | length 4.4
  Top Layer w0.381: R5.1@459.308,25.842 459.43,25.964 460.892,25.964 T2.B@460.908,25.981 ; T2.B@461.013,26.086 T2.B@460.908,25.981 ; Q1.3@461.95,24.266 461.204,24.266 460.908,24.562 T2.B@460.908,25.981
NetQ2_3: Q2.3 R25.1 T5.B | length 4.5
  Top Layer w0.381: R25.1@380.67,25.995 382.081,25.995 382.398,26.311 382.448,26.311 382.448,24.677 382.671,24.453 Q2.3@383.271,24.453
NetQ3_3: Q3.3 R45.1 T8.B | length 4.5
  Top Layer w0.381: R45.1@302.108,26.503 302.166,26.561 303.802,26.561 303.809,26.568 303.809,24.921 304.033,24.698 Q3.3@304.876,24.698
NetQ4_3: Q4.3 R66.1 T11.B | length 4.5
  Top Layer w0.381: R66.1@222.987,25.918 223.037,25.918 223.325,26.207 T11.B@224.804,26.207 224.804,24.497 224.968,24.333 225.434,24.333 Q4.3@225.527,24.241
NetQ5_3: Q5.3 R88.1 T14.B | length 4.3
  Top Layer w0.381: R88.1@145.364,25.741 145.47,25.847 146.974,25.847 T14.B@147.08,25.953 147.08,24.404 147.304,24.181 147.888,24.181 Q5.3@147.955,24.114
NetQ6_3: Q6.3 R108.1 T17.B | length 4.1
  Top Layer w0.381: R108.1@65.608,26.426 65.629,26.447 67.267,26.447 T17.B@67.288,26.468 67.332,26.468 67.642,26.159 Q6.3@67.642,24.241
NetR2_2: R2.2 U3.3 | length 4.6
  Top Layer w0.381: U3.3@458.716,17.868 458.716,19.55 459.765,20.599 R2.2@459.765,22.072
NetR7_1: R7.1 U2.1 | length 2.3
  Top Layer w0.381: U2.1@420.954,46.147 R7.1@420.954,48.437
NetR8_1: R8.1 R11.1 T3.B | length 4
  Top Layer w0.381: R11.1@416.688,38.837 416.714,38.811 417.753,38.811 R8.1@417.779,38.785 417.779,38.1 418.552,37.327 T3.B@418.552,36.227
NetR8_2: R8.2 U2.3 | length 2.1
  Top Layer w0.381: R8.2@417.779,39.65 418.464,39.65 418.871,39.243 419.588,39.243 U2.3@419.684,39.147
NetR10_1: R10.1 U3.25 | length 3.5
  Top Layer w0.381: U3.25@436.716,17.868 436.716,19.454 438.049,20.787 R10.1@438.099,20.787
NetR12_1: R12.1 U3.4 | length 7.8
  Top Layer w0.381: U3.4@457.716,13.868 457.713,13.871 457.713,15.347 458.104,15.738 R12.1@463.855,15.738
NetR14_1: R14.1 U3.23 | length 2.9
  Top Layer w0.381: U3.23@438.716,17.868 438.887,18.039 438.887,19.253 439.217,19.583 R14.1@439.217,20.597
NetR15_2: R15.2 U3.11
NetR16_2: R16.2 U3.15
NetR18_1: R18.1 U5.2 | length 1.6
  Top Layer w0.381: U5.2@441.909,46.811 R18.1@441.909,48.437
NetR20_1: R20.1 U6.2 | length 1.6
  Top Layer w0.381: U6.2@430.352,46.811 R20.1@430.352,48.437
NetR23_2: R23.2 U9.3 | length 5
  Top Layer w0.25: U9.3@379.748,17.843 379.748,19.347 381.102,20.701 R23.2@381.102,22.275
NetR28_1: R28.1 U9.25 | length 2.9
  Top Layer w0.381: U9.25@357.748,17.843 357.886,17.981 R28.1@357.886,20.66
NetR29_1: R29.1 U9.4 | length 7.9
  Top Layer w0.381: U9.4@378.748,13.843 378.79,13.885 378.79,15.367 379.146,15.723 383.591,15.723 383.911,16.042 R29.1@384.886,16.042
NetR31_1: R31.1 U9.23 | length 3.1
  Top Layer w0.381: R31.1@358.953,20.649 358.953,19.146 359.748,18.351 U9.23@359.748,17.843
NetR32_2: R32.2 U9.11
NetR33_2: R33.2 U9.15
NetR35_1: R35.1 U11.2 | length 1.6
  Top Layer w0.381: U11.2@362.128,47.141 R35.1@362.128,48.767
NetR37_1: R37.1 U12.2 | length 1.8
  Top Layer w0.381: R37.1@350.444,48.767 350.444,47.141 U12.2@350.571,47.141
NetR39_1: R39.1 U13.1 | length 2
  Top Layer w0.381: U13.1@341.808,46.477 R39.1@341.808,48.513
NetR40_1: R40.1 R41.1 T6.B | length 3.8
  Top Layer w0.381: R41.1@337.542,39.167 337.579,39.204 338.722,39.204 R40.1@338.76,39.242 338.76,37.788 339.483,37.065 T6.B@339.533,37.065
NetR40_2: R40.2 U13.3 | length 2.3
  Top Layer w0.381: R40.2@338.76,40.108 340.298,40.108 340.538,39.868 U13.3@340.538,39.477
NetR43_2: R43.2 U15.3 | length 5.7
  Top Layer w0.381: U15.3@301.037,17.868 301.481,18.313 301.481,19.567 302.743,20.828 R43.2@302.743,22.884
NetR48_2: R48.2 U26.28 | length 2.2
  Top Layer w0.25: U26.28@36.611,63.828 38.819,63.828 R48.2@38.847,63.856
NetR49_1: R49.1 U15.25 | length 4.2
  Top Layer w0.381: R49.1@277.673,20.864 277.673,18.212 278.016,17.868 U15.25@279.037,17.868
NetR50_1: R50.1 U15.4 | length 7.4
  Top Layer w0.381: U15.4@300.037,13.868 300.05,13.882 300.05,15.189 300.472,15.611 R50.1@305.943,15.611
NetR52_1: R52.1 U15.23 | length 4.4
  Top Layer w0.381: R52.1@278.892,20.675 280.163,20.675 281.037,19.801 U15.23@281.037,17.868
NetR53_2: R53.2 U15.11
NetR54_2: R54.2 U15.15
NetR56_1: R56.1 U17.2 | length 1.7
  Top Layer w0.381: U17.2@285.902,47.319 R56.1@285.902,48.997
NetR58_1: R58.1 U18.2 | length 1.7
  Top Layer w0.381: R58.1@274.472,48.945 274.472,47.573 U18.2@274.726,47.319
NetR60_1: R60.1 U19.1 | length 2.2
  Top Layer w0.381: U19.1@265.963,46.655 R60.1@265.963,48.818
NetR61_1: R61.1 R62.1 T9.B | length 3.1
  Top Layer w0.381: R62.1@261.773,39.599 261.799,39.573 262.763,39.573 R61.1@262.788,39.547 262.788,39.534 263.13,39.193 T9.B@263.13,37.624
NetR61_2: R61.2 U19.3 | length 2.5
  Top Layer w0.381: R61.2@262.788,40.412 264.345,40.412 264.693,40.064 U19.3@264.693,39.655
NetR64_2: R64.2 U21.3 | length 3.8
  Top Layer w0.381: U21.3@221.404,17.995 221.793,18.384 221.793,19.431 222.966,20.604 222.966,21.111 R64.2@223.012,21.157
NetR69_1: R69.1 U21.25 | length 3.3
  Top Layer w0.381: R69.1@198.933,21.016 198.831,20.915 198.831,20.066 199.404,19.493 U21.25@199.404,17.995
NetR70_1: R70.1 U21.4 | length 7.6
  Top Layer w0.381: U21.4@220.404,13.995 220.447,14.038 220.447,15.342 220.792,15.687 R70.1@226.492,15.687
NetR72_1: R72.1 U21.23 | length 3.4
  Top Layer w0.381: R72.1@200.05,20.827 200.05,20.814 200.96,19.905 200.96,18.44 U21.23@201.404,17.995
NetR73_2: R73.2 U21.11
NetR74_2: R74.2 U21.15
NetR76_1: R76.1 U23.2 | length 2.1
  Top Layer w0.381: R76.1@201.32,48.945 201.32,47.065 U23.2@201.447,46.938
NetR78_1: R78.1 U24.2 | length 1.9
  Top Layer w0.381: R78.1@190.017,48.818 190.017,47.065 U24.2@190.144,46.938
NetR80_1: R80.1 U25.1 | length 1.9
  Top Layer w0.381: U25.1@181.762,46.274 R80.1@181.762,48.183
NetR81_1: R81.1 R82.1 T12.B | length 3.1
  Top Layer w0.381: R82.1@177.674,38.938 177.699,38.963 178.69,38.963 R81.1@178.714,38.988 178.773,38.929 178.773,37.023 T12.B@178.832,36.964
NetR81_2: R81.2 U25.3 | length 2
  Top Layer w0.381: R81.2@178.714,39.854 178.714,39.841 178.794,39.761 179.314,39.761 179.705,39.37 180.396,39.37 U25.3@180.492,39.274
NetR84_2: R84.2 U26.60 | length 2.8
  Top Layer w0.25: R84.2@22.367,60.427 22.466,60.328 U26.60@25.111,60.328
NetR86_2: R86.2 U28.3 | length 6.5
  Top Layer w0.381: U28.3@142.02,17.868 142.02,19.49 142.723,20.193 143.561,20.193 145.412,22.044 145.412,22.322 R86.2@145.491,22.402
NetR91_1: R91.1 U28.25 | length 3.2
  Top Layer w0.381: U28.25@120.02,17.868 120.02,20.706 120.279,20.965 R91.1@120.294,20.965
NetR92_1: R92.1 U28.4 | length 7.7
  Top Layer w0.381: U28.4@141.02,13.868 141.097,13.946 141.097,15.215 141.732,15.85 145.999,15.85 146.228,16.078 147,16.078 R92.1@147.066,16.144
NetR94_1: R94.1 U28.23 | length 3.1
  Top Layer w0.381: R94.1@121.59,20.802 121.59,18.298 U28.23@122.02,17.868
NetR95_2: R95.2 U28.11
NetR96_2: R96.2 U28.15
NetR98_1: R98.1 U30.2 | length 1.7
  Top Layer w0.381: R98.1@124.333,48.462 124.333,46.963 U30.2@124.46,46.836
NetR100_1: R100.1 U31.2 | length 1.6
  Top Layer w0.381: U31.2@113.411,46.836 R100.1@113.411,48.462